# EAGLE board thinkingcap10a (EAGLE 6.2)
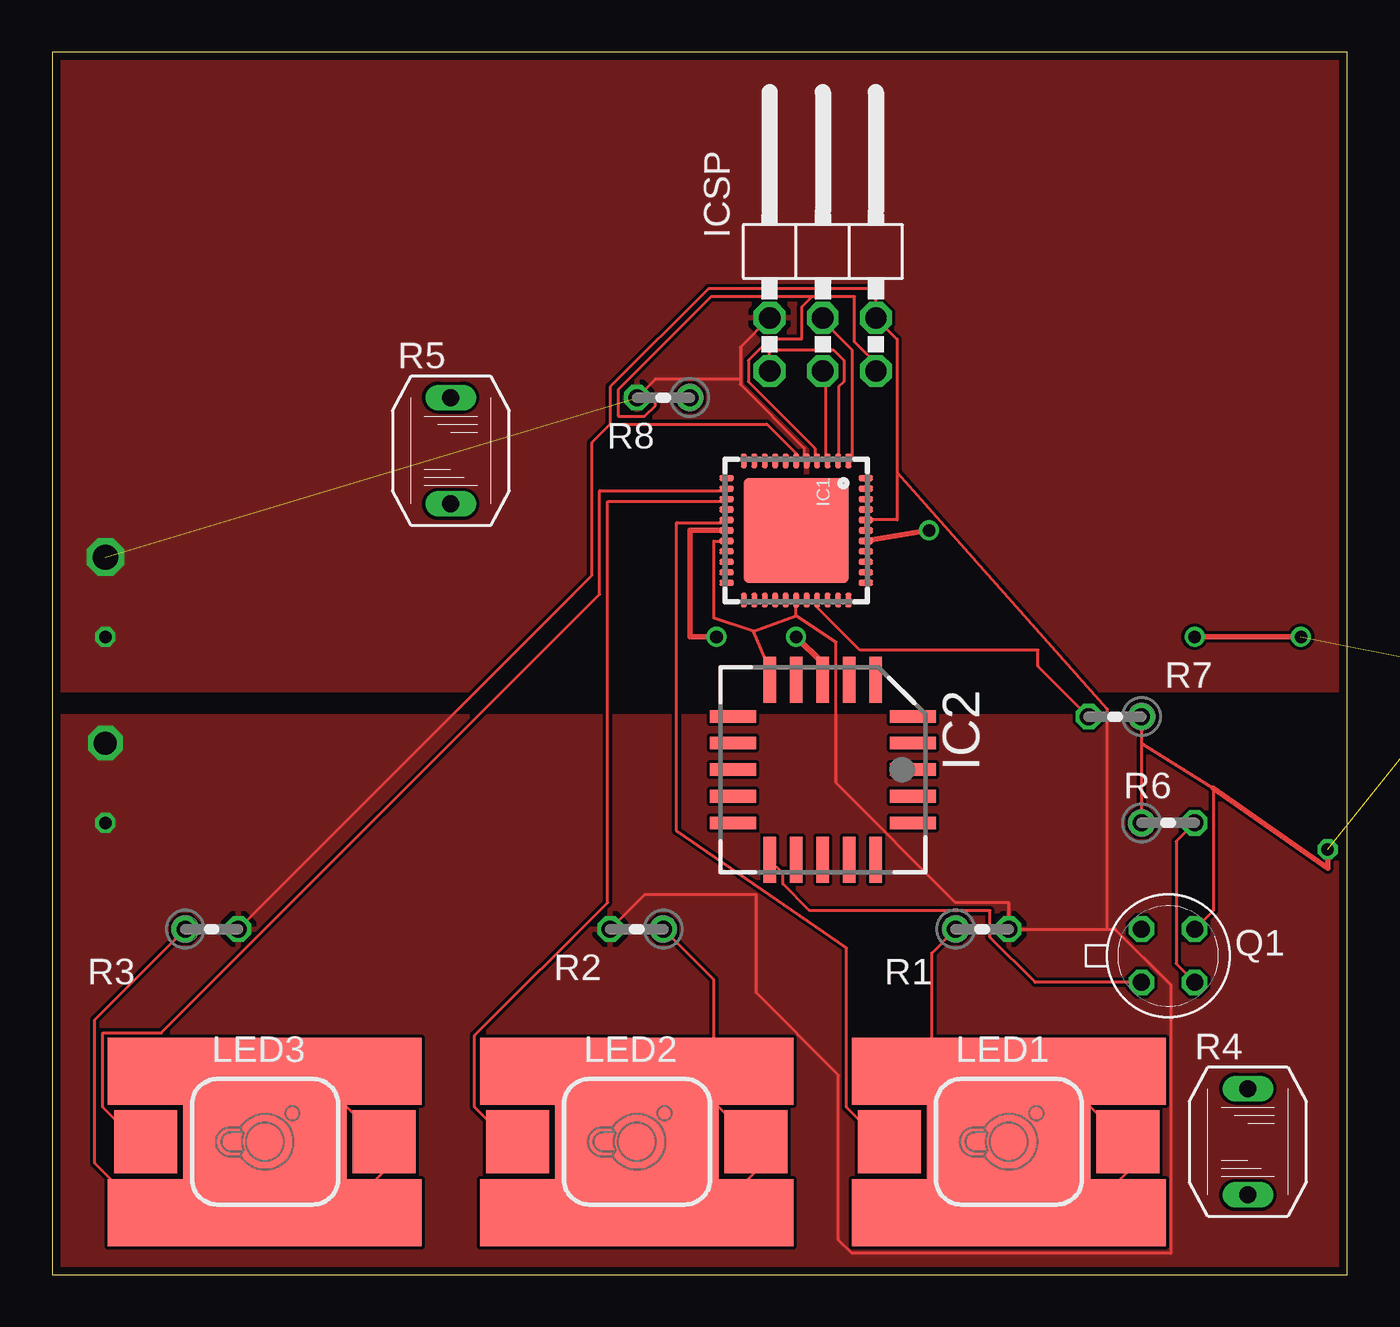
[diagram p0: board, top side]
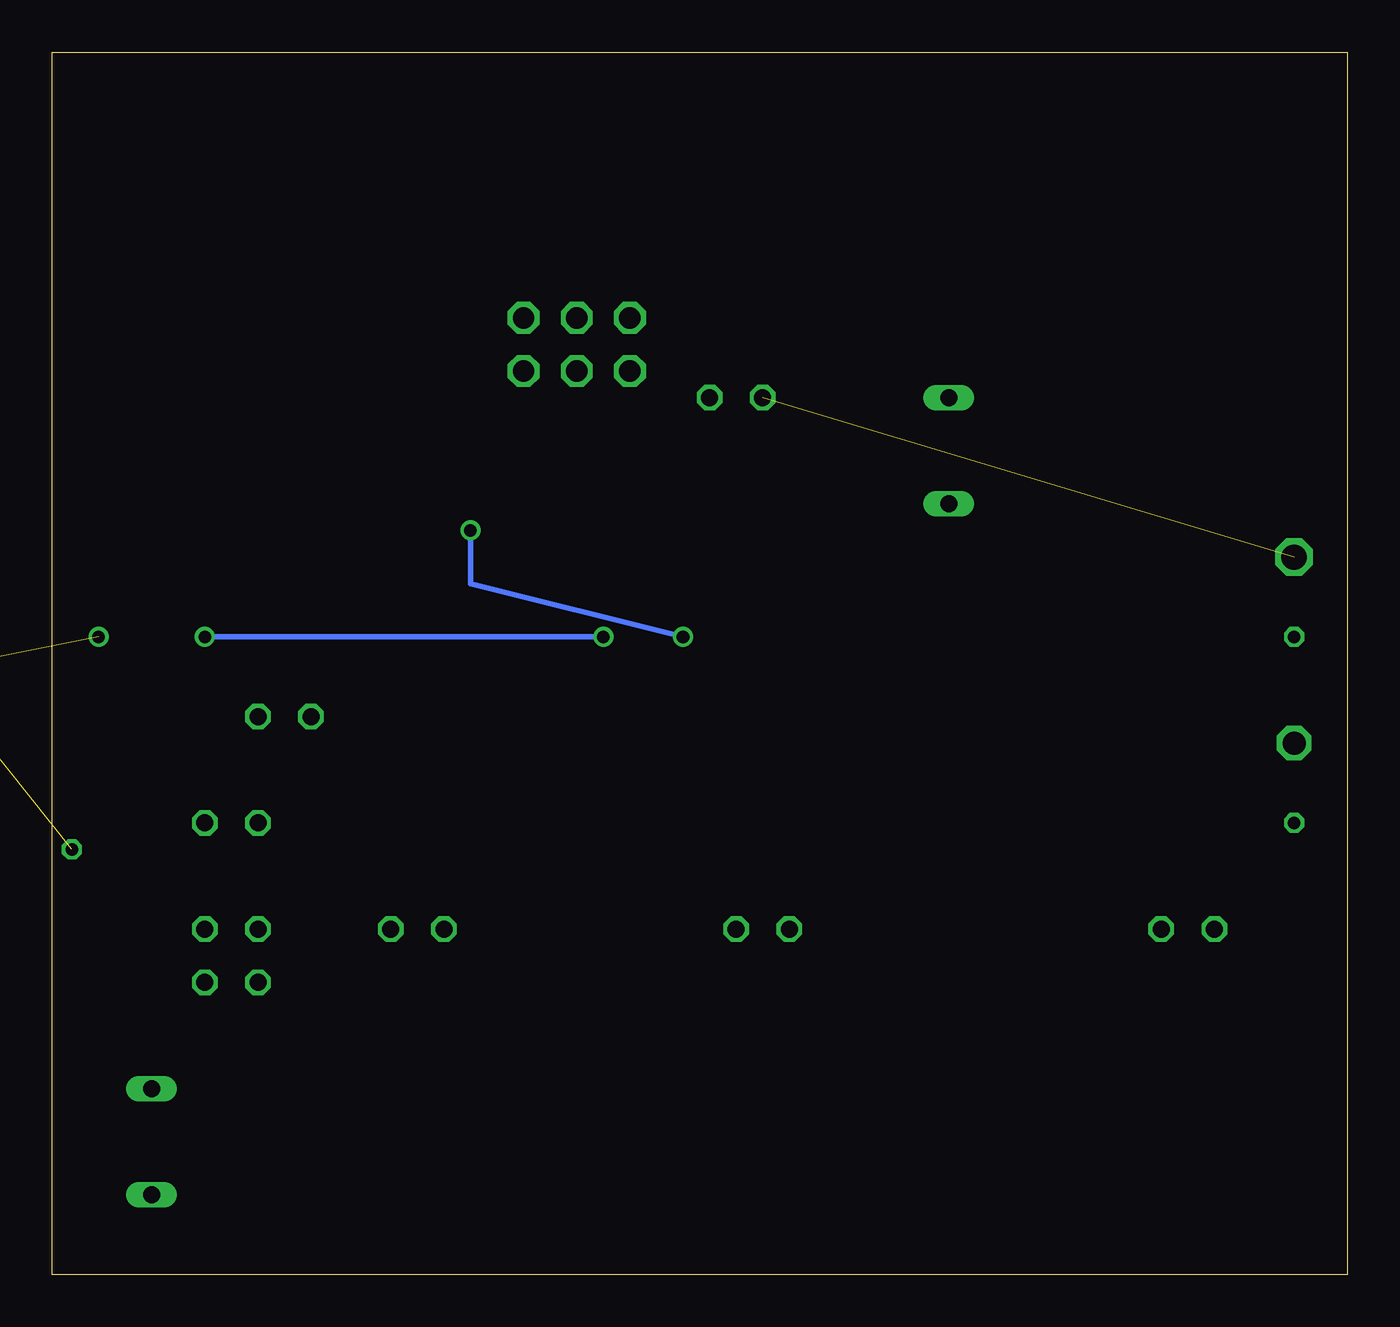
[diagram p1: board, bottom side, seen from below]

Size 61.9 x 58.41 mm. Coordinates in mm from the lower left corner, seen from the top.
Outline: 0,0 61.9,0 61.9,58.41 0,58.41 0,0
Copper layers (1*16): Top 0.0356mm / dielectric 1.5011mm / Bottom 0.0356mm
Design rules: minimum track width 6mil, minimum drill 13mil, track to track 6mil, track to pad 6mil, pad to pad 6mil, via to via 6mil, smd to smd 6mil, copper to edge 15mil, drill to drill 6mil, minimum pad ring 7mil, minimum via ring 7mil, stop-mask expansion 4mil, vias tented up to drill 0mil, thermal gap 10mil

## Footprints (pad centres in the part's own frame; a part is rotated, then mirrored left to right if it is on the bottom)
MLF44-TH = smd 0.7 x 0.3: 1 -3.325,2.5; 2 -3.325,2; 3 -3.325,1.5; 4 -3.325,1; 5 -3.325,0.5; 6 -3.325,0; 7 -3.325,-0.5; 8 -3.325,-1; 9 -3.325,-1.5; 10 -3.325,-2; 11 -3.325,-2.5; 23 3.325,-2.5; 24 3.325,-2; 25 3.325,-1.5; 26 3.325,-1; 27 3.325,-0.5; 28 3.325,0; 29 3.325,0.5; 30 3.325,1; 31 3.325,1.5; 32 3.325,2; 33 3.325,2.5 | smd 0.3 x 0.7: 12 -2.5,-3.325; 13 -2,-3.325; 14 -1.5,-3.325; 15 -1,-3.325; 16 -0.5,-3.325; 17 0,-3.325; 18 0.5,-3.325; 19 1,-3.325; 20 1.5,-3.325; 21 2,-3.325; 22 2.5,-3.325; 34 2.5,3.325; 35 2,3.325; 36 1.5,3.325; 37 1,3.325; 38 0.5,3.325; 39 0,3.325; 40 -0.5,3.325; 41 -1,3.325; 42 -1.5,3.325; 43 -2,3.325; 44 -2.5,3.325 | smd 5 x 5: TH 0,0
PLCC20 = smd 0.6 x 2.2: 1 0,4.3; 2 -1.27,4.3; 3 -2.54,4.3; 9 -2.54,-4.3; 10 -1.27,-4.3; 11 0,-4.3; 12 1.27,-4.3; 13 2.54,-4.3; 19 2.54,4.3; 20 1.27,4.3 | smd 2.2 x 0.6: 4 -4.3,2.54; 5 -4.3,1.27; 6 -4.3,0; 7 -4.3,-1.27; 8 -4.3,-2.54; 14 4.3,-2.54; 15 4.3,-1.27; 16 4.3,0; 17 4.3,1.27; 18 4.3,2.54
2X03/90 = drill 1.016 octagon: 1 -2.54,-6.35; 2 -2.54,-3.81; 3 0,-6.35; 4 0,-3.81; 5 2.54,-6.35; 6 2.54,-3.81
W57B = smd 3 x 3: A -5.7,0; C 5.7,0 | smd 7.5 x 3.2: C@1 3.75,3.375; C@2 -3.75,3.375; C@3 -3.75,-3.4; C@4 3.75,-3.4 | smd 7.8 x 4: C@5 0,0
0204V = drill 0.813 octagon: 1 -1.27,0; 2 1.27,0
TO72 = drill 0.813 octagon: 1 -1.27,-1.27; 2 1.27,-1.27; 3 1.27,1.27; 4 -1.27,1.27
P592 = drill 0.813 long: 1 0,2.54; 2 0,-2.54

## Placement (x,y rotation side)
IC1  ATMEGA644M  [MLF44-TH]  35.56,35.56 270 top
IC2  AD811E  [PLCC20]  36.83,24.13 270 top
ICSP  [2X03/90]  36.83,49.53 0 top
LED1  LAW57B  [W57B]  45.72,6.35 0 top
LED2  LAW57B  [W57B]  27.94,6.35 0 top
LED3  LAW57B  [W57B]  10.16,6.35 0 top
LOAD  [0204V]  66.04,27.94 270 top  (outside the outline)
Q1  2N4416  [TO72]  53.34,15.24 0 top
R1  330  [0204V]  44.45,16.51 0 top
R2  330  [0204V]  27.94,16.51 180 top
R3  330  [0204V]  7.62,16.51 0 top
R4  P592  [P592]  57.15,6.35 0 top
R5  P592  [P592]  19.05,39.37 0 top
R6  10k  [0204V]  53.34,21.59 0 top
R7  47k  [0204V]  50.8,26.67 180 top
R8  10k  [0204V]  29.21,41.91 180 top

## Library data of the parts
IC1 = atmel; MPN: ATMEGA644P-20MU; OC_FARNELL: 1748528; OC_NEWARK: 26R5636
IC2 = analog-devices; OC_FARNELL: unknown; OC_NEWARK: unknown
ICSP = pinhead
LED1-LED3 = led
LOAD R1-R3 R6-R8 = rcl
Q1 = transistor-fet
R4 R5 = varistor

## Nets
+5V: IC1.5 ICSP.2 R8.2
/RESET: IC1.4 ICSP.5 R8.1
AVCC: IC1.27
EXP: IC1.TH
GND: IC1.6 IC1.18 IC1.28 IC1.39 IC1.40 IC2.8 ICSP.6 R1.2 R2.2 R3.2
N$1: IC1.13 LED3.A
N$2: IC1.14 LED2.A
N$3: IC1.16 LED1.A
N$4: LED1.C LED1.C@1 LED1.C@2 LED1.C@3 LED1.C@4 LED1.C@5 R1.1
N$5: LED2.C LED2.C@1 LED2.C@2 LED2.C@3 LED2.C@4 LED2.C@5 R2.1
N$6: LED3.C LED3.C@1 LED3.C@2 LED3.C@3 LED3.C@4 LED3.C@5 R3.1
N$7: IC1.2 ICSP.1
N$8: IC2.6 LOAD.1
N$9: IC2.14 Q1.1
N$10: Q1.2 R6.2
N$11: IC1.30 R7.2
N$12: LOAD.2 Q1.3 R6.1 R7.1
N$13: IC1.3 ICSP.3
N$14: IC1.1 ICSP.4
VCC: IC1.17 IC1.38

## Tracks (layer width: path | path; a pad name or v marks a point on that pad's centre or on a via)
+5V  (via drill 0.6, 1.2)  (1 unrouted)
  Top 0.152: 32.89,42.8 32.89,44.32 ICSP.2 | 32.89,42.8 32.89,42.55 35.94,39.5 35.94,38.99 IC1.5 | R8.2 28.83,42.8 32.89,42.8
  other vias: 2.54,30.48 2.54,34.29
  pour Top: 0,58.42 62.23,58.42 62.23,27.94 0,27.94
/RESET
  Top 0.152: 36.32,46.74 35.81,46.23 35.81,44.7 34.29,44.7 33.27,43.69 33.27,42.67 36.45,39.5 36.45,38.99 IC1.4 | 36.32,46.74 38.35,46.74 38.35,44.58 39.37,43.56 ICSP.5 | R8.1 28.83,41.91 28.83,41.53 28.32,41.02 27.05,41.02 27.05,42.29 31.5,46.74 36.32,46.74
GND  (via drill 0.6, 1.1)
  Top 0.152: 35.56,31.5 IC1.28 | 33.53,30.73 34.29,28.96 IC2.8 | 33.53,30.73 35.56,31.5 | 33.53,30.73 31.62,31.37 31.62,35.05 32.13,35.05 IC1.18 | R2.2 28.32,18.16 33.66,18.16 33.66,13.46 37.59,9.52 37.59,1.65 38.23,1.02 53.47,1.02 53.47,13.84 50.8,16.51 50.42,16.51 | 50.42,16.51 R1.2 45.72,17.78 43.18,17.78 37.47,23.5 37.47,30.23 35.56,31.5 | IC1.39 38.86,35.56 38.86,35.94 IC1.40 38.99,36.07 40.39,36.07 40.39,38.35 | IC1.6 35.56,39.24 34.16,40.64 26.67,40.64 | 26.67,40.64 26.67,42.42 31.37,47.12 39.37,47.12 ICSP.6 40.39,44.7 40.39,38.35 | R3.2 25.78,33.4 25.78,39.75 26.67,40.64 | 50.42,16.51 50.42,27.05 40.39,38.35
  other vias: 2.54,25.4 2.54,21.59
  pour Top: 0,26.67 62.23,26.67 62.23,0 0,0
N$1
  Top 0.152: LED3.A 4.06,6.35 2.41,8 2.41,11.56 5.21,11.56 26.16,32.51 26.16,37.47 32.13,37.47 IC1.13
N$2
  Top 0.152: LED2.A 21.84,6.35 20.19,8 20.19,11.43 26.54,17.78 26.54,36.96 32.13,36.96 IC1.14
N$3
  Top 0.152: LED1.A 39.62,6.35 37.97,8 37.97,15.62 29.85,21.21 29.85,35.94 32.13,35.94 IC1.16
N$4
  Top 0.152: 49.53,8.13 51.31,6.35 | 49.53,8.13 49.53,9.65 LED1.C@1 49.53,8.13 | 51.31,6.35 51.31,4.83 49.53,3.05 LED1.C@4 | 51.31,6.35 LED1.C | R1.1 42.04,15.37 42.04,9.78 LED1.C@2 41.91,9.65 41.91,6.35 | 41.91,6.35 41.91,3.05 LED1.C@3 | 41.91,6.35 LED1.C@5 45.72,8.13 49.53,8.13
N$5
  Top 0.152: R2.1 31.62,14.1 31.62,9.78 LED2.C@1 | 31.75,8.13 33.53,6.35 | 31.75,8.13 31.75,9.65 LED2.C@1 | 33.53,6.35 33.53,4.83 31.75,3.05 LED2.C@4 | 33.53,6.35 LED2.C | 24.13,6.35 24.13,9.65 LED2.C@2 | 24.13,6.35 24.13,3.05 LED2.C@3 | 24.13,6.35 LED2.C@5 27.94,8.13 31.75,8.13 | 31.75,8.13 LED2.C@1
N$6
  Top 0.152: 13.97,8.13 15.75,6.35 | 13.97,8.13 13.97,9.65 LED3.C@1 13.97,8.13 | 15.75,6.35 15.75,4.83 13.97,3.05 LED3.C@4 | 15.75,6.35 LED3.C | R3.1 2.03,12.19 2.03,5.33 4.32,3.05 6.35,3.05 | 6.35,3.05 6.35,6.35 | 6.35,6.35 6.35,9.65 LED3.C@2 | 6.35,3.05 LED3.C@3 | 6.35,6.35 LED3.C@5 10.16,8.13 13.97,8.13
N$7
  Top 0.152: ICSP.1 34.29,44.2 37.34,44.2 37.85,43.69 37.85,42.67 37.59,42.42 37.59,38.99 IC1.2
N$8  (via drill 0.6)  (1 unrouted)
  Top 0.254: IC2.6 36.83,29.21 v35.56,30.48 | v54.61,30.48 v59.69,30.48
  Bottom 0.254: v35.56,30.48 v54.61,30.48
N$9
  Top 0.152: Q1.1 46.99,13.97 44.83,16.13 44.83,17.4 36.19,17.4 34.92,18.67 34.92,19.18 34.29,19.81 IC2.14
N$10
  Top 0.152: Q1.2 53.72,14.86 53.72,20.7 R6.2
N$11
  Top 0.152: R7.2 47.12,29.08 47.12,29.84 38.61,29.84 36.58,31.88 36.58,32.13 IC1.30
N$12  (via drill 0.6)  (1 unrouted)
  Top 0.152: R7.1 52.07,25.4 | 52.07,25.4 R6.1 | Q1.3 55.5,17.4 55.5,23.24 52.07,25.4
  Top 0.254: 55.5,23.24 60.96,19.43 v60.96,20.32
N$13
  Top 0.152: ICSP.3 36.96,43.05 36.96,38.99 IC1.3
N$14
  Top 0.152: ICSP.4 36.83,45.59 38.23,44.2 38.23,39.12 38.1,38.99 IC1.1
VCC  (via drill 0.6)
  Top 0.254: IC1.17 30.48,35.56 30.48,30.48 v31.75,30.48 | v41.91,35.56 IC1.38
  Bottom 0.254: v31.75,30.48 41.91,33.02 v41.91,35.56